# Altium PCB MP28164_2020-12-02_17-46-48.pcbdoc
Units mm, origin at the board's own origin, x right, y up, seen from the top; angles counter-clockwise.
Board outline 28.89 x 28.97 mm, 2 copper layers (Top Layer, Bottom Layer); 1 components, 0 nets, 11 pads, 0 vias.
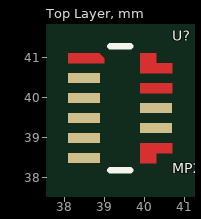
[diagram p0: Top Layer view]
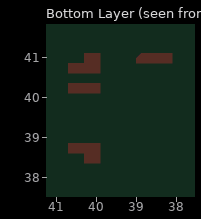
[diagram p1: Bottom Layer view, seen from below]

## Layer stack, top to bottom
Top Layer: signal copper (thickness not stored)
Dielectric: dielectric 0.32, FR-4, Dk 4.8
Bottom Layer: signal copper (thickness not stored)

## Board outline
54.289,25.4 25.4,25.4 25.4,54.369 54.289,54.369

## Components (designator, comment, footprint, x,y, rotation, side; value= is the part's Value field where it differs from the comment)
U? "MP28164" MP28164 39.4,39.758 r0 top

## Footprints (in the part's own frame and the unit in brackets; to place one, negate y for a bottom-side part, rotate by r counter-clockwise, add the part's x,y. Pads: shape width x height; smd on the part's side, far side on the other; paste and mask are expansions set on the pad)
MP28164 [mm]
  round 0 smd: 1(-0.85,1.222) 7(0.9,-1.153) 10(0.9,0.472) 11(0.9,1.097)
  rect 0.8x0.25 smd: 2(-0.9,0.722) 3(-0.9,0.222) 4(-0.9,-0.278) 5(-0.9,-0.778) 6(-0.9,-1.278) 8(0.9,-0.528) 9(0.9,-0.028)
  Top Layer region: -0.525,1.347 -0.4,1.222 -0.4,1.097 -1.3,1.097 -1.3,1.347
  Top Layer region: 0.5,0.347 0.5,0.597 1.3,0.597 1.3,0.347
  Top Layer region: 0.5,0.847 0.5,1.347 0.9,1.347 0.9,1.097 1.3,1.097 1.3,0.847
  Top Layer region: 0.5,-0.903 0.5,-1.403 0.9,-1.403 0.9,-1.153 1.3,-1.153 1.3,-0.903
  silkscreen extent -0.25,-1.58 0.25,1.52

## Nets (pads, with @x,y where several pads share a name; then routed paths per layer and width w, separated by ;. In a path a pad name is that pad's centre, name@x,y a point inside that pad or via, vN(x,y) a via of type N, cw(c..) or ccw(c..) an arc to the next point about the centre after c; other vN are vias at no path point)
pads on no net: U?.1 U?.2 U?.3 U?.4 U?.5 U?.6 U?.7 U?.8 U?.9 U?.10 U?.11

## Silkscreen, mask and mechanical layers (free items; w line width, h text height)
Document:
  lines w0.003: 39.819,39.859 39.87,39.91